# EAGLE board BlinkyBall-v6 (EAGLE 6.2)
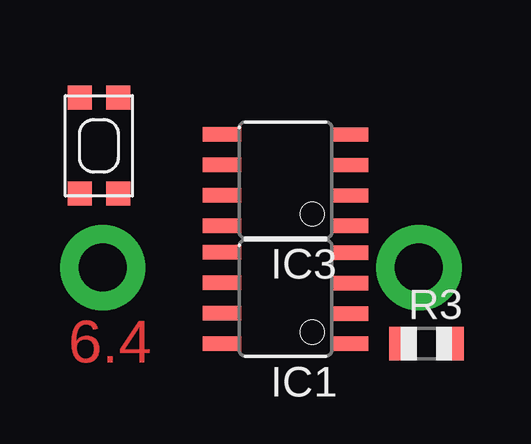
[diagram p0: board, top side]
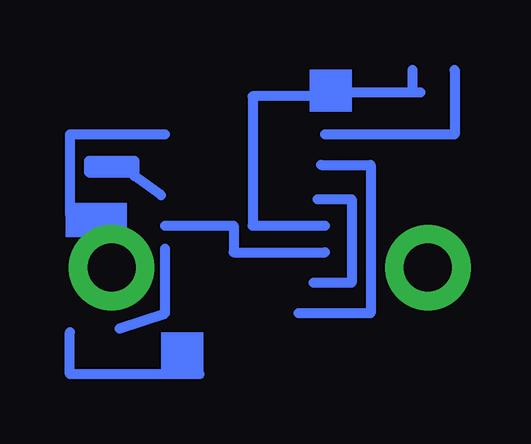
[diagram p1: board, bottom side, seen from below]

No outline drawn. Coordinates in mm, seen from the top.
Copper layers (1*16): Top 0.035mm / dielectric 1.5mm / Bottom 0.035mm
Design rules: minimum track width 10mil, minimum drill 24mil, track to track 8mil, track to pad 8mil, pad to pad 8mil, via to via 8mil, smd to smd 8mil, copper to edge 40mil, drill to drill 8mil, minimum pad ring 10mil, minimum via ring 8mil, stop-mask expansion 4mil, vias tented up to drill 0mil, thermal gap 10mil

## Footprints (pad centres in the part's own frame; a part is rotated, then mirrored left to right if it is on the bottom)
KMR2 = smd 1 x 1: 1 2,0.8; 2 2,-0.8; 3 -2,0.8; 4 -2,-0.8
8S1 = smd 0.6 x 1.6: 1 -1.905,-2.654; 2 -0.645,-2.654; 3 0.625,-2.654; 4 1.895,-2.654; 5 1.905,2.654; 6 0.635,2.654; 7 -0.635,2.654; 8 -1.905,2.654
R0805 = smd 1.1 x 1.4: 1 -1,0; 2 1,0

## Placement (x,y rotation side)
E$2  [KMR2]  3.97,15.08 90 top
IC1  TINY13-20SSU  [8S1]  11.75,8.73 90 top
IC3  TINY13-20SSU  [8S1]  11.75,13.65 90 top
R3  [R0805]  17.62,6.83 0 top

## Library data of the parts
E$2 R3 = adafruit
IC1 IC3 = atmel; MPN: ATTINY13-20SSU; OC_FARNELL: 1455133; OC_NEWARK: 58M3771

## Nets
N$25: IC3.5

## Tracks (layer width: path | path; a pad name or v marks a point on that pad's centre or on a via)
S$1
  Bottom 0.406: 4.45,17.3 4.76,17.3 | 4.76,17.3 7.3,17.3 | 4.76,17.3 4.76,18.26
S$3  (via drill 2 pad 3.56)
  other vias: 17.3,10 4.13,10
S$4
  Bottom 0.406: 3.02,18.26 3.02,15.56 8.41,15.56
S$5
  Bottom 0.406: 8.73,17.14 11.43,17.14 11.43,11.75 8.41,11.75
S$6
  Bottom 0.406: 8.57,14.29 6.51,14.29 6.51,8.1 9.53,8.1
S$7
  Bottom 0.406: 8.73,12.86 7.3,12.86 7.3,9.37 8.89,9.37
S$8
  Bottom 0.406: 15.08,11.75 12.22,11.75 12.22,10.64 8.41,10.64
S$9
  Bottom 0.406: 15.08,15.56 19.05,15.56 19.05,12.22
S$10
  Bottom 0.406: 15.24,13.02 16.35,13.81 16.35,14.45 18.26,14.45 18.26,14.29 | 18.26,14.29 18.26,13.97 16.51,13.97 | 16.67,14.13 18.26,14.29
S$12
  Bottom 0.406: 13.65,5.56 19.05,5.56 19.05,7.3
S$13
  Bottom 0.406: 16.99,7.46 15.08,8.1 15.08,10.79
(copper drawn outside any net)
  shapes: Bottom area x3

## Text on the board
Top: 6.4